# Allegro board sophum_imu.brd
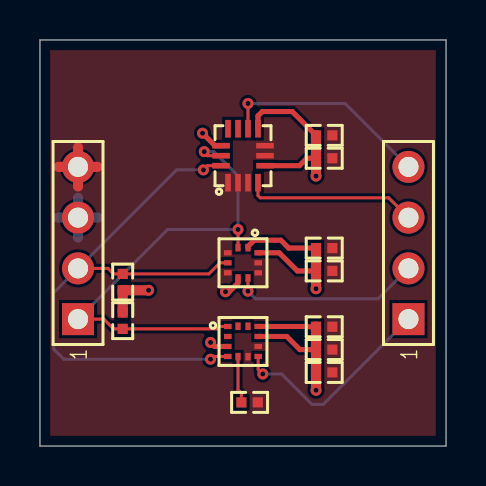
[diagram p0: board, top side]
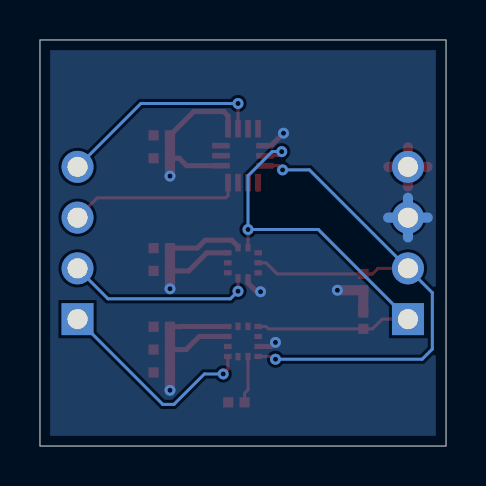
[diagram p1: board, bottom side, seen from below]

Outline 20.32 x 20.32 mm; copper layers: TOP, BOTTOM. Coordinates in mm from the lower left corner of the outline.
Outline path: 0,20.32 20.32,20.32 20.32,0 0,0 0,20.32

## Placement (name value [footprint] x y rotation side)
C1  100nF  [C0402]  14.22 14.4 0 top
C2  100nF  [C0402]  14.22 15.54 0 top
C3  220nF  [C0402]  10.49 2.18 0 top
C4  100nF  [C0402]  14.22 5.97 0 top
C5  100nF  [C0402]  14.22 3.68 0 top
C6  10uF  [C0402]  14.22 4.83 0 top
C7  100nF  [C0402]  14.22 9.91 0 top
C8  100nF  [C0402]  14.22 8.76 0 top
J1  HDR4X1  [HDR4X1-2R54-TM-VM]  1.91 6.35 90 top
J2  HDR4X1  [HDR4X1-2R54-TM-VM]  18.44 6.35 90 top
R1  4K7  [R0402]  4.14 6.27 270 top
R2  4K7  [R0402]  4.14 8.2 90 top
U1  LSM6DSM  [LGA-14L]  10.16 14.53 90 top
U2  LIS2MDL  [LGA-12]  10.16 5.23 0 top
U3  LPS22HB  [HLGA-10L]  10.16 9.17 270 top

## Library data of the parts
C1-C8 = CAPACITOR-POL
J1 J2 = HEADER-4X1
R1 R2 = RESISTOR
U1 = LSM6DSM
U2 = LIS2MDL
U3 = LPS22HB

## Footprints (pads in the part's own frame, mm; a bottom-side part is the same pattern mirrored in y, then rotated)
C0402
  rect 0.51x0.51 smd: 1(-0.41,0) 2(0.41,0)
HDR4X1-2R54-TM-VM
  rect 1.6x1.6 hole 1: 1(0,0)
  round 1.6 hole 1: 2(2.54,0) 3(5.08,0) 4(7.62,0)
HLGA-10L
  rect 0.38x0.26 smd: 1(-0.76,0.25) 2(-0.76,-0.25) 6(0.76,-0.25) 7(0.76,0.25)
  rect 0.26x0.38 smd: 3(-0.5,-0.76) 4(0,-0.76) 5(0.5,-0.76) 8(0.5,0.76) 9(0,0.76) 10(-0.5,0.76)
LGA-12
  rect 0.38x0.26 smd: 1(-0.76,0.75) 2(-0.76,0.25) 3(-0.76,-0.25) 4(-0.76,-0.75) 7(0.76,-0.75) 8(0.76,-0.25) 9(0.76,0.25) 10(0.76,0.75)
  rect 0.26x0.38 smd: 5(-0.25,-0.76) 6(0.25,-0.76) 11(0.25,0.76) 12(-0.25,0.76)
LGA-14L
  rect 0.88x0.28 smd: 1(-1.35,0.75) 2(-1.35,0.25) 3(-1.35,-0.25) 4(-1.35,-0.75) 8(1.35,-0.75) 9(1.35,-0.25) 10(1.35,0.25) 11(1.35,0.75)
  rect 0.28x0.88 smd: 5(-0.5,-1.1) 6(0,-1.1) 7(0.5,-1.1) 12(0.5,1.1) 13(0,1.1) 14(-0.5,1.1)
R0402
  rect 0.51x0.51 smd: 1(-0.41,0) 2(0.41,0)

## Nets
GND: C1.2 C2.2 C3.2 C4.2 C5.2 C6.2 C7.2 C8.2 J1.4 U1.1(SDO/SA0) U1.2(SDX) U1.3(SCX) U1.6(GND#6) U1.7(GND#7) U2.6(GND#6) U2.8(GND#8) U3.3(RES) U3.5(SDO/SA0) U3.8(GND#8) U3.9(GND#9)
VCC: C1.1 C2.1 C4.1 C5.1 C6.1 C7.1 C8.1 J1.3 R1.1 R2.1 U1.5(VDDIO) U1.8(VDD) U1.12(CS) U2.3(CS) U2.9(VDD) U2.10(VDDIO) U3.1(VDDIO) U3.6(CS) U3.10(VDD)
AINT: J2.4 U1.9(INT2)
BINT: J2.2 U3.7(INT_DRDY)
GINT: J2.3 U1.4(INT1)
MINT: J2.1 U2.7(INT/DRDY/SDO)
SCL: J1.1 R1.2 U1.13(SCL) U2.1(SCL/SPC) U3.2(SCL/SPC)
SDA: J1.2 R2.2 U1.14(SDA) U2.4(SDA/SDI/SDO) U3.4(SDA/SDI/SDO)
N01379: C3.1 U2.5(C1)

Pads without a net: U1 10 11; U2 2 11 12

## Via types
v1: diameter 0.55, hole 0.254, TOP to BOTTOM, 14 vias

## Routing (per net, layer and track width the routed paths; a pad name or vN(x,y) marks a point on that pad's centre or on a via; arc(x,y) is an arc through that point)
GND: length 3.9
  TOP w0.508: 1.91,13.97 0.93,13.97 ; 1.91,13.97 2.88,13.97 ; 1.91,13.97 1.91,12.99 ; 1.91,13.97 1.91,14.95
VCC: length 36.7
  TOP w0.254: v1(8.54,5.18) 8.74,4.98 U2.3 ; C2.1 12.62,16.74 11.13,16.74 10.91,16.52 U1.8 ; C6.1 13,4.83 12.35,5.48 U2.9 ; U1.5 12.98,14.03 13.36,14.4 C1.1 ; v1(8.14,15.65) 8.76,15.03 U1.12 ; C4.1 13.31,5.97 13.29,5.98 U2.10 ; U3.6 9.91,8.16 9.47,7.72 v1(9.28,7.72) ; C8.1 12.88,8.76 11.97,9.67 U3.10 ; U3.1 10.41,9.99 10.72,10.3 12.05,10.3 12.45,9.91 C7.1
  TOP w0.508: v1(13.81,13.51) C1.1 C2.1 ; C7.1 C8.1 v1(13.81,7.87) ; v1(13.81,2.79) C5.1 C6.1 C4.1 ; R1.1 R2.1 v1(5.44,7.79)
  BOTTOM w0.508: 1.91,11.43 1.91,12.42 ; 1.91,11.43 2.9,11.43 ; 1.91,11.43 1.91,10.44 ; 1.91,11.43 0.91,11.43
AINT: length 10.6
  TOP w0.152: U1.9 v1(10.41,17.14)
  BOTTOM w0.152: J2.4 15.27,17.14 v1(10.41,17.14)
BINT: length 9.5
  TOP w0.152: U3.7 v1(10.41,7.75)
  BOTTOM w0.152: J2.2 16.92,7.37 10.79,7.37 v1(10.41,7.75)
GINT: length 8.6
  TOP w0.152: U1.4 10.91,12.54 11.02,12.42 17.45,12.42 J2.3
MINT: length 10.7
  TOP w0.152: v1(11.15,3.61) 10.92,3.84 U2.7
  BOTTOM w0.152: v1(11.15,3.61) 12.09,3.61 13.61,2.08 14.17,2.08 J2.1
SCL: length 24.3
  TOP w0.152: v1(8.22,14.73) 8.23,14.72 8.23,14.68 8.38,14.53 U1.13 ; U3.2 9.91,10.83 v1(9.91,10.84) ; J1.1 3.2,6.35 3.68,5.86 R1.2 8.89,5.86 9.01,5.98 U2.1
  BOTTOM w0.152: J1.1 6.39,10.84 v1(9.91,10.84) 9.91,13.52 8.7,14.73 v1(8.22,14.73)
SDA: length 30.6
  TOP w0.152: U3.4 9.01,9.17 8.45,8.61 R2.2 3.68,8.61 3.41,8.89 1.91,8.89 ; v1(8.53,4.34) 8.67,4.48 U2.4 ; v1(8.18,13.82) 8.39,14.03 U1.14
  BOTTOM w0.152: v1(8.18,13.82) 6.83,13.82 0.69,7.67 0.69,4.85 1.19,4.34 v1(8.53,4.34)
N01379: length 2.4
  TOP w0.152: U2.5 9.91,2.81 10.08,2.64 C3.1

## Copper pours and planes (outline as drawn; the poured copper is in the pictures)
GND on TOP: 0.51,0.51 0.51,19.81 19.81,19.81 19.81,0.51
VCC on BOTTOM: 0.51,0.51 0.51,19.81 19.81,19.81 19.81,0.51 ; 1 cut-out

## Text on the board
NCLEGEND-1-2: FIGURE | SIZE | 10.0 | 39.37 | DRILL CHART: TOP to BOTTOM | ALL UNITS ARE IN MILS | PLATED | QTY | 14 | 8
